# Altium PCB MA18V17.PcbDoc
Units mm, origin at the board's own origin, x right, y up, seen from the top; angles counter-clockwise.
Board outline 93.98 x 57.15 mm, 2 copper layers (Top Layer, Bottom Layer); 20 components, 10 nets, 71 pads, 13 vias.
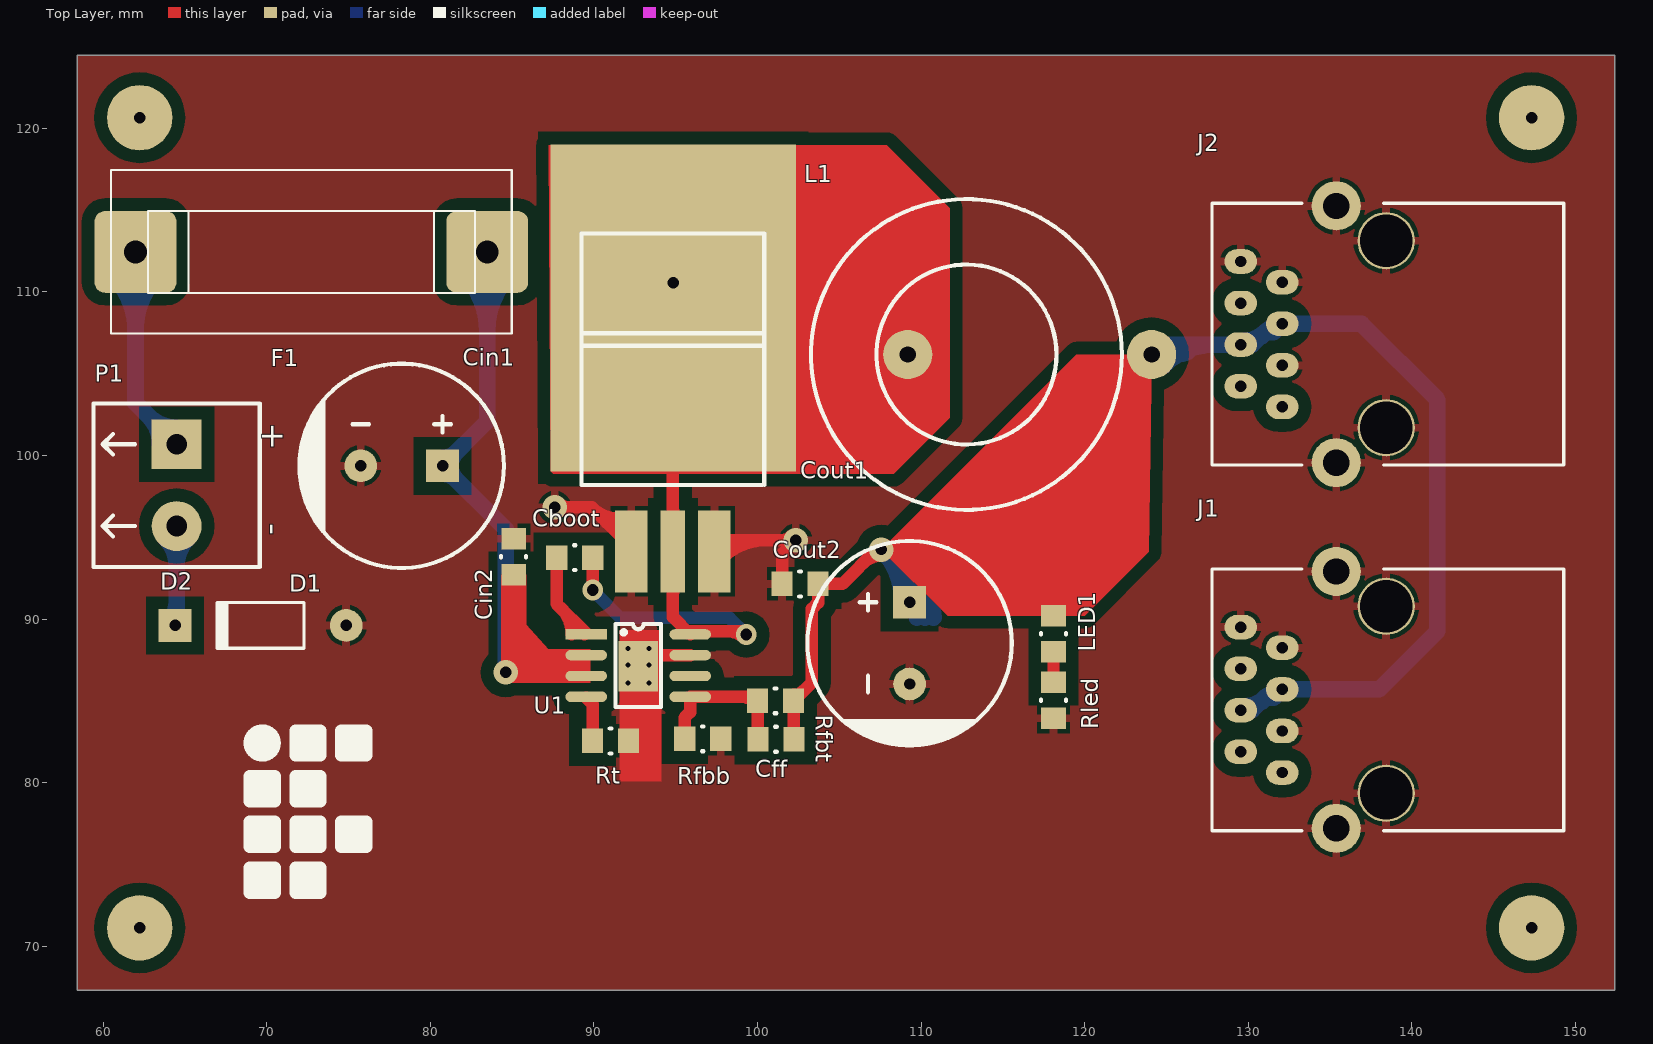
[diagram p0: Top Layer view]
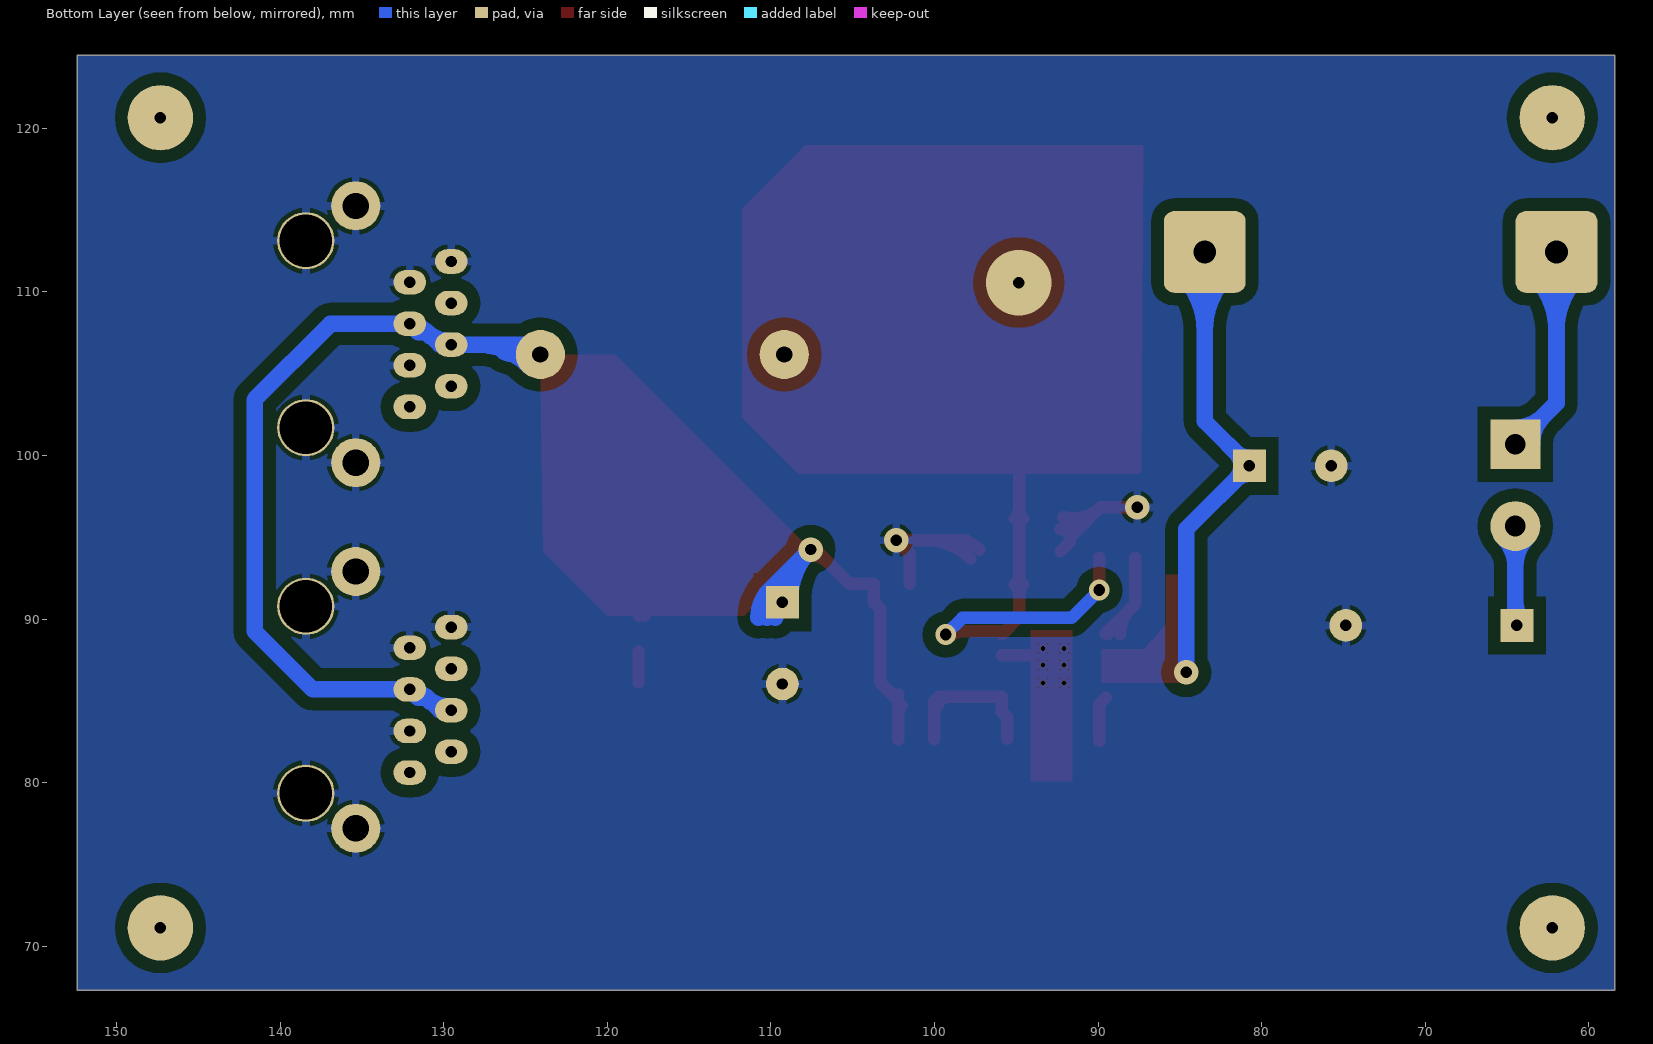
[diagram p1: Bottom Layer view, seen from below]
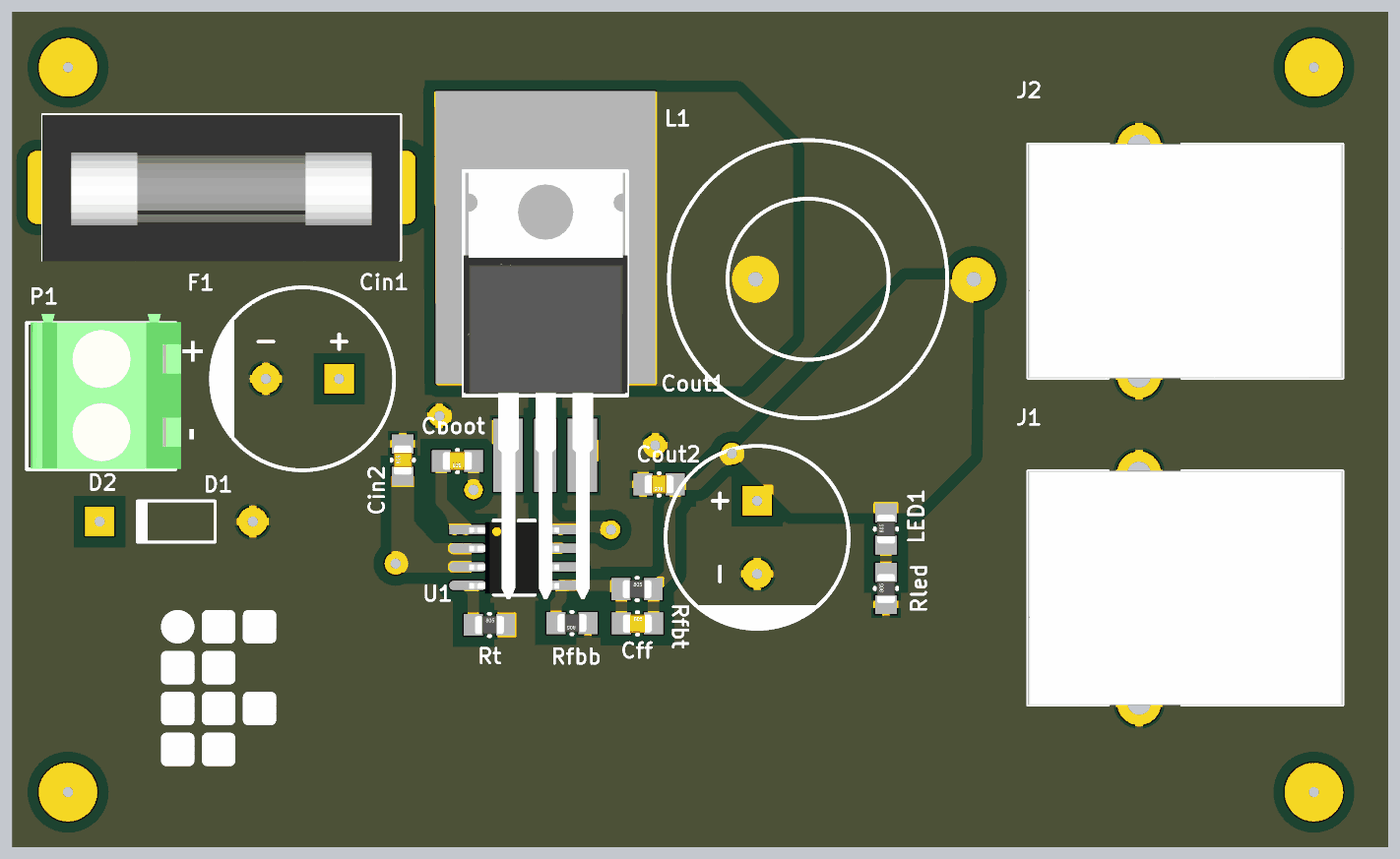
[diagram p2: 3D render of the assembled board from above, using the file's embedded part models]

## Layer stack, top to bottom
Top Layer: signal copper 0.0356
Dielectric: dielectric 0.32, FR-4, Dk 4.8
Bottom Layer: signal copper 0.0356

## Board outline
58.42,67.31 152.4,67.31 152.4,124.46 58.42,124.46

## Design rules (kind name [scope] priority, off if disabled: settings)
Clearance Clearance_malha [InNet('CAN_GND')] p1: gap=0.762
Clearance [All] p2: gap=0.508
HoleSize [All] p1: absolutevalues=TRUE maxlimit=4 minlimit=0.7 maxpercent=80.000 minpercent=20.000
PlaneConnect [All] p1: planeconnectstyle=Relief reliefexpansion=0.508 reliefentries=4 reliefconductorwidth=0.508 reliefairgap=0.254
PolygonConnect [All] p1: connectstyle=Relief reliefconductorwidth=0.508 reliefentries=4 polygonreliefangle="90 Angle"
RoutingVias [All] p1: holewidth=0.711 width=1.27 viastyle="Through Hole" minholewidth=0.711 minwidth=1.27 maxholewidth=0.711 maxwidth=1.27
SilkscreenOverComponentPads [IsPad] p1: minsilkscreentomaskgap=0.254
SolderMaskExpansion [All] p1: expansion=0.102
Width [All] p1: maxlimit=1.016 minlimit=0.254 preferedwidth=0.762
25 further rules are at their usual default settings.

## Components (designator, comment, footprint, x,y, rotation, side; value= is the part's Value field where it differs from the comment)
Cboot "100 nF" 0805C#1 89.925,93.75 r180 top
Cff "33.0 pF" 0805C#1 100.025,82.65 r0 top
Cin1 "100uF" CP-RAD-12.5mm-35.0mm-5.0mm 80.747,99.365 r180 top
Cin2 "100 nF" 0805C#1 85.09,92.71 r90 top
Cout1 "100 uF" CP-RAD-12.5mm-35.0mm-5.0mm 109.296,91.03 r270 top
Cout2 "100 nF" 0805C#2 102.6,92.15 r180 top
D1 "MBR20200CTG" TO-220-DEITADO 74.25,90.325 r0 top
D2 "1N4001" DIO10.46-5.3x2.8 69.621,89.611 r180 top
F1 "Fuse 1" 5x20 61.976,112.446 r0 top
J1 "RJ45 (canbus)" "ASSMANN A-2004-2-4-LP/FS" 138.391,85.062 r90 top
J2 "RJ45 (canbus)" "ASSMANN A-2004-2-4-LP/FS" 138.391,107.414 r90 top
L1 "100 uH" "TOROLDAL D:20, H:10" 112.776,106.172 r225 top
LED1 "150080SS75000" 0805R 118.096,88 r90 top
P1 "Battery" KRE_2 64.491,100.686 r270 top
Rfbb "4k7" 0805R 97.75,82.675 r180 top
Rfbt "110k" 0805R 100,85 r0 top
Rled "750R" 0805R 118.096,83.936 r90 top
Rt "47k" 0805R 89.916,82.55 r0 top
U1 "LMR16030" LMR16030 78.359,80.677 r0 top
X1 "Logomarca IFSC" IFSC_SILK 69.723,82.423 r0 top

## Footprints (in the part's own frame and the unit in brackets; to place one, negate y for a bottom-side part, rotate by r counter-clockwise, add the part's x,y. Pads: shape width x height; smd on the part's side, far side on the other; paste and mask are expansions set on the pad)
5x20 [mm]
  rrect25% 5x5 hole 1.4: 1(0,0) 2(21.5,0)
  silkscreen extent -1.5,-5 23,5, body extent -1.5,-5.05 22.9,4.95, height 10.5
0805C#1 [mm] "Chip Capacitor; Body 2 x 1.3 mm (LxW typ)"
  rect 1.3x1.5 smd: 1(0,0) 2(2.2,0)
  silkscreen extent 1.05,-0.76 1.15,0.76, body extent 0.1,-0.64 2.1,0.62, height 0.78
0805C#2 [mm] "Chip Capacitor; Body 2 x 1.3 mm (LxW typ)"
  rect 1.3x1.5 smd: 1(-1.1,0) 2(1.1,0)
  silkscreen extent -0.05,-0.76 0.05,0.76, body extent -1,-0.64 1,0.62, height 0.78
0805R [mm] "Chip Resistor; Body 2 x 1.3 mm (LxW typ)"
  rect 1.3x1.5 smd: 1(0,0) 2(2.2,0)
  silkscreen extent 1.05,-0.76 1.15,0.76, body extent 0.1,-0.64 2.1,0.62, height 0.78
"ASSMANN A-2004-2-4-LP/FS" [mm]
  oval 1.5x2 hole 0.7: 1(-4.445,6.31) 2(-3.175,8.85) 3(-1.905,6.31) 4(-0.635,8.85) 5(0.635,6.31) 6(1.905,8.85) 7(3.175,6.31) 8(4.445,8.85)
  round 3 hole 1.6: S(-7.855,3.01) S(7.845,3.01)
  round 3.5 hole 3.2: S(-5.715,-0.04) S(5.715,-0.04)
  silkscreen extent -8,-10.9 8,10.6, body extent -8,-10.9 8,10.6, height 13.6
CP-RAD-12.5mm-35.0mm-5.0mm [mm] "Radial Capacitor; D 12.5mm; L 35.0mm; P 5.0mm"
  rect 2x2 hole 0.7: 1(0,0)
  round 2 hole 0.7: 2(5,0)
  silkscreen extent -3.75,-6.25 8.75,6.25
DIO10.46-5.3x2.8 [mm] "Diode, Axial; Body 5.2 x 2.7 mm (LxDia. max), Lead Dia. 0.86 mm (max)"
  round 2 hole 0.7: 1(-5.23,0)
  rect 2x2 hole 0.7: 2(5.23,0)
  silkscreen extent -2.65,-1.4 2.75,1.4
IFSC_SILK [mm]
  silkscreen extent -1.01,-9.14 6.35,1.02
KRE_2 [mil] "Terminal Block 2 pins"
  rect 120x120 hole 50: 1(0,0)
  round 120 hole 50: 2(196.85,0)
  silkscreen extent -98,-200 295,200, body extent -123,-190 294,216, height 559
LMR16030 [mil]
  rect 100x25 smd: 1(440,330)
  oval 100x25 smd: 2(440,280) 3(440,230) 4(440,180) 5(690,180) 6(690,230) 7(690,280) 8(690,330)
  rect 94.49x122.05 smd: 9(565,253.74)
  silkscreen extent 510,155 620,355, body extent 444,157 686,350, height 69
TO-220-DEITADO [mm]
  rect 2x5 smd: 1(18.034,3.81) 3(23.114,3.81)
  rect 1.5x5 smd: 2(20.574,3.81)
  rect 15x20 smd: 4(20.6,18.7)
  silkscreen extent 14.99,7.87 26.16,23.24, body extent 14.99,-6.03 26.21,23.3, height 4.71
"TOROLDAL D:20, H:10" [mm]
  round 3 hole 1: 1(2.54,-2.54) 2(-8.001,8.001)
  silkscreen extent -9.5,-9.5 9.5,9.5, body extent -13.92,-14.11 14.3,14.11, height 10

## Part data
Cboot Cff Cin2 Cout2: library part Capacitor, "Capacitor"
Cin1 Cout1: library part CapacitorPol, "Solid Aluminum Capacitor with Organic Semiconductor Electrolyte: 100uF, 10V, Bulk Pack"
D1: library part CMP-1051-00023-1, "SWITCHMODE(TM) Power Rectifier, Dual Schottky Rectifiers, 3-Pin TO-220, Pb-Free, Tube"
D2: library part "Diode 1N4001", "1 Amp General Purpose Rectifier"
F1: "Fuse"
J1 J2: library part "Modular Jack with Shield", "YH-59-01"
L1: library part Inductor, "Inductor"
LED1: library part CMP-1426-00010-1, "SMD mono-color Chip LED, WL-SMCW, Super Red"
P1: library part KRE_2, "Terminal Block 1x2"
Rfbb Rfbt Rled Rt: library part Resistor, "Resistor"
U1: library part Component_1
X1: library part logomarcaIFSC

## Free pads (board coordinates)
  round 4 hole 0.7: 0(62.23,71.12) 0(62.23,120.65) 1(147.32,71.12) 1(147.32,120.65)

## Via types
v1: diameter 0.3, hole 0.3, Top Layer to Bottom Layer, 6 vias
v2: diameter 1.5, hole 0.7, Top Layer to Bottom Layer, 4 vias
v3: diameter 1.27, hole 0.711, Top Layer to Bottom Layer, 2 vias
v4: diameter 4, hole 0.7, Top Layer to Bottom Layer, 1 vias

## Nets (pads, with @x,y where several pads share a name; then routed paths per layer and width w, separated by ;. In a path a pad name is that pad's centre, name@x,y a point inside that pad or via, vN(x,y) a via of type N, cw(c..) or ccw(c..) an arc to the next point about the centre after c; other vN are vias at no path point)
+18V: Cff.2 Cout1.1 Cout2.1 J1.4 J1.5 J2.4 J2.5 L1.2 LED1.2 Rfbt.2 | length 269.4
  Top Layer w0.762: Cff.2 102.225,84.975 Rfbt.2 103.325,86.125 103.325,90.625 103.7,91 Cout2.1 105.188,92.15 107.288,94.25 v2(107.575,94.25) 114.046,94.25 ; 106.455,93.417 cw(c107.575,92.297) v2@107.575,93.881 ; v2@107.836,93.989 cw(c108.466,93.359) 108.466,94.25 cw(c108.466,95.141) v2@107.836,94.511 ; LED1.2 114.046,94.25 ; L1.2 114.046,96.127 114.046,94.25 ; Rfbt.2@102.01,84.71 cw(c101.49,84.19) 102.225,84.19 ; Rfbt.2@102.01,84.71 cw(c101.49,84.19) 102.225,84.19 ; Rfbt.2@102.01,84.71 cw(c101.49,84.19) 102.225,84.19 ; Rfbt.2@102.01,84.71 cw(c101.49,84.19) 102.225,84.19 ; Rfbt.2@102.2,85.369 ccw(c102.2,86.26) Rfbt.2@102.83,85.63 ; Rfbt.2@102.2,85.369 ccw(c102.2,86.26) Rfbt.2@102.83,85.63 ; Rfbt.2@102.2,85.369 ccw(c102.2,86.26) Rfbt.2@102.83,85.63 ; Rfbt.2@102.2,85.369 ccw(c102.2,86.26) Rfbt.2@102.83,85.63 ; 106.651,93.613 cw(c107.575,92.69) v2@107.575,93.996 ; 106.651,93.613 cw(c107.575,92.69) v2@107.575,93.996 ; 106.651,93.613 cw(c107.575,92.69) v2@107.575,93.996 ; LED1.2@117.466,90.83 cw(c116.836,90.2) LED1.2@117.727,90.2 ; LED1.2@117.466,90.83 cw(c116.836,90.2) LED1.2@117.727,90.2 ; LED1.2@117.466,90.83 cw(c116.836,90.2) LED1.2@117.727,90.2 ; LED1.2@117.466,90.83 cw(c116.836,90.2) LED1.2@117.727,90.2 ; 122.181,104.262 cw(c124.091,102.351) L1.2@124.091,105.053 ; 122.181,104.262 ccw(c120.271,106.172) L1.2@122.972,106.172 ; 122.181,104.262 cw(c124.091,102.351) L1.2@124.091,105.053 ; 122.181,104.262 ccw(c120.271,106.172) L1.2@122.972,106.172 ; 122.181,104.262 cw(c124.091,102.351) L1.2@124.091,105.053 ; 122.181,104.262 ccw(c120.271,106.172) L1.2@122.972,106.172 ; 122.181,104.262 cw(c124.091,102.351) L1.2@124.091,105.053 ; 122.181,104.262 ccw(c120.271,106.172) L1.2@122.972,106.172 ; 122.764,105.395 cw(c124.336,104.974) L1.2@124.01,106.569 ; 122.764,105.395 cw(c124.336,104.974) L1.2@124.01,106.569 ; 122.764,105.395 cw(c124.336,104.974) L1.2@124.01,106.569 ; 122.764,105.395 cw(c124.336,104.974) L1.2@124.01,106.569 ; 122.764,105.395 cw(c124.336,104.974) L1.2@124.01,106.569 ; 122.764,105.395 cw(c124.336,104.974) L1.2@124.01,106.569 ; 123.314,104.845 ccw(c122.893,106.417) L1.2@124.488,106.091 ; 123.314,104.845 ccw(c122.893,106.417) L1.2@124.488,106.091 ; 123.314,104.845 ccw(c122.893,106.417) L1.2@124.488,106.091 ; 123.314,104.845 ccw(c122.893,106.417) L1.2@124.488,106.091 ; 123.314,104.845 ccw(c122.893,106.417) L1.2@124.488,106.091 ; 123.314,104.845 ccw(c122.893,106.417) L1.2@124.488,106.091
  Bottom Layer w1.016: Cout1.1@108.805,91.055 ccw(c104.593,91.268) v2(107.575,94.25) 110.236,91.589 Cout1.1@110.236,90.09 ; 109.193,92.632 cw(c107.672,91.112) Cout1.1@109.82,91.003 ; L1.2 124.698,106.779 J2.4 130.244,106.779 130.994,107.529 ; J1.4 130.244,84.427 130.994,85.177 ; 108.336,93.489 cw(c104.937,90.09) Cout1.1@109.744,90.09 ; 108.336,93.489 cw(c104.937,90.09) Cout1.1@109.744,90.09 ; 108.336,93.489 cw(c104.937,90.09) Cout1.1@109.744,90.09 ; Cout1.1@108.96,91.389 ccw(c108.415,91.97) 109.185,92.177 ; Cout1.1@108.96,91.389 ccw(c108.415,91.97) 109.185,92.177 ; Cout1.1@108.96,91.389 ccw(c108.415,91.97) 109.185,92.177 ; Cout1.1@109.049,91.492 cw(c109.544,90.566) 110.453,91.091 ; Cout1.1@109.049,91.492 cw(c109.544,90.566) 110.453,91.091 ; Cout1.1@109.049,91.492 cw(c109.544,90.566) 110.453,91.091 ; Cout1.1@109.388,91.546 cw(c109.16,90.264) 110.417,90.601 ; Cout1.1@109.388,91.546 cw(c109.16,90.264) 110.417,90.601 ; Cout1.1@109.388,91.546 cw(c109.16,90.264) 110.417,90.601 ; Cout1.1@109.888,90.438 ccw(c109.048,91.278) Cout1.1@110.236,91.278 ; Cout1.1@109.888,90.438 ccw(c109.048,91.278) Cout1.1@110.236,91.278 ; Cout1.1@109.888,90.438 ccw(c109.048,91.278) Cout1.1@110.236,91.278 ; Cout1.1@110.071,91.754 cw(c108.406,90.09) 110.76,90.09 ; Cout1.1@110.071,91.754 cw(c108.406,90.09) 110.76,90.09 ; Cout1.1@110.071,91.754 cw(c108.406,90.09) 110.76,90.09 ; Cout1.1@110.236,91.278 ccw(c111.424,91.278) 110.584,90.438 ; Cout1.1@110.236,91.278 ccw(c111.424,91.278) 110.584,90.438 ; Cout1.1@110.236,91.278 ccw(c111.424,91.278) 110.584,90.438 ; L1.2@124.074,106.189 cw(c125.499,104.765) 125.499,106.779 ; L1.2@124.074,106.189 cw(c125.499,104.765) 125.499,106.779 ; L1.2@124.074,106.189 cw(c125.499,104.765) 125.499,106.779 ; L1.2@124.074,106.189 cw(c125.499,104.765) 125.499,106.779 ; L1.2@124.793,105.471 cw(c127.951,102.312) 127.951,106.779 ; L1.2@124.793,105.471 cw(c127.951,102.312) 127.951,106.779 ; L1.2@124.793,105.471 cw(c127.951,102.312) 127.951,106.779 ; L1.2@124.793,105.471 cw(c127.951,102.312) 127.951,106.779 ; L1.2@124.933,106.696 ccw(c125.804,107.238) 126.316,106.35 ; L1.2@124.933,106.696 ccw(c125.804,107.238) 126.316,106.35 ; L1.2@124.933,106.696 ccw(c125.804,107.238) 126.316,106.35 ; L1.2@124.933,106.696 ccw(c125.804,107.238) 126.316,106.35 ; L1.2@124.933,106.696 ccw(c125.804,107.238) 126.316,106.35 ; J1.4@129.791,84.669 ccw(c129.791,86.348) 130.978,85.161 ; J1.4@129.791,84.669 ccw(c129.791,86.348) 130.978,85.161 ; J1.4@129.791,84.669 ccw(c129.791,86.348) 130.978,85.161 ; J1.4@129.791,84.669 ccw(c129.791,86.348) 130.978,85.161 ; J2.4@129.791,107.021 ccw(c129.791,108.7) 130.978,107.513 ; J2.4@129.791,107.021 ccw(c129.791,108.7) 130.978,107.513 ; J2.4@129.791,107.021 ccw(c129.791,108.7) 130.978,107.513 ; J2.4@129.791,107.021 ccw(c129.791,108.7) 130.978,107.513 ; J1.4@130.001,84.306 cw(c131.198,83.615) 130.84,84.95 ; J1.4@130.001,84.306 cw(c131.198,83.615) 130.84,84.95 ; J1.4@130.001,84.306 cw(c131.198,83.615) 130.84,84.95 ; J1.4@130.001,84.306 cw(c131.198,83.615) 130.84,84.95 ; J1.4@130.001,84.306 cw(c131.198,83.615) 130.84,84.95 ; J1.4@130.001,84.306 cw(c131.198,83.615) 130.84,84.95 ; J2.4@130.001,106.658 cw(c131.198,105.967) 130.84,107.302 ; J2.4@130.001,106.658 cw(c131.198,105.967) 130.84,107.302 ; J2.4@130.001,106.658 cw(c131.198,105.967) 130.84,107.302 ; J2.4@130.001,106.658 cw(c131.198,105.967) 130.84,107.302 ; J2.4@130.001,106.658 cw(c131.198,105.967) 130.84,107.302 ; J2.4@130.001,106.658 cw(c131.198,105.967) 130.84,107.302 ; 130.877,85.06 cw(c131.831,84.106) J1.5@131.831,85.455 ; 130.877,85.06 cw(c131.831,84.106) J1.5@131.831,85.455 ; 130.877,85.06 cw(c131.831,84.106) J1.5@131.831,85.455 ; 130.877,85.06 cw(c131.831,84.106) J1.5@131.831,85.455 ; 130.877,107.412 cw(c131.831,106.458) J2.5@131.831,107.807 ; 130.877,107.412 cw(c131.831,106.458) J2.5@131.831,107.807 ; 130.877,107.412 cw(c131.831,106.458) J2.5@131.831,107.807 ; 130.877,107.412 cw(c131.831,106.458) J2.5@131.831,107.807 ; 130.994,85.177 cw(c131.686,84.485) J1.5@131.802,85.457 ; 130.994,85.177 ccw(c130.994,85.775) J1.5@131.59,85.72 ; 130.994,85.177 cw(c131.686,84.485) J1.5@131.802,85.457 ; 130.994,85.177 ccw(c130.994,85.775) J1.5@131.59,85.72 ; 130.994,85.177 cw(c131.686,84.485) J1.5@131.802,85.457 ; 130.994,85.177 ccw(c130.994,85.775) J1.5@131.59,85.72 ; 130.994,85.177 cw(c131.686,84.485) J1.5@131.802,85.457 ; 130.994,85.177 ccw(c130.994,85.775) J1.5@131.59,85.72 ; 130.994,85.177 131.561,85.177 J1.5 138.01,85.697 141.566,89.253 141.566,103.417 136.934,108.049 J2.5 131.561,107.529 130.994,107.529 ; 130.994,107.529 cw(c131.686,106.837) J2.5@131.802,107.809 ; 130.994,107.529 ccw(c130.994,108.127) J2.5@131.59,108.072 ; 130.994,107.529 cw(c131.686,106.837) J2.5@131.802,107.809 ; 130.994,107.529 ccw(c130.994,108.127) J2.5@131.59,108.072 ; 130.994,107.529 cw(c131.686,106.837) J2.5@131.802,107.809 ; 130.994,107.529 ccw(c130.994,108.127) J2.5@131.59,108.072 ; 130.994,107.529 cw(c131.686,106.837) J2.5@131.802,107.809 ; 130.994,107.529 ccw(c130.994,108.127) J2.5@131.59,108.072 ; 109.173,92.223 ccw(c111.887,92.95) 110.482,90.516 cw(c111.887,92.95) 109.173,92.223 ; Cout1.1@109.562,90.616 cw(c109.959,89.999) 110.444,90.55 ccw(c109.959,89.999) Cout1.1@109.562,90.616
+VBAT: F1.1 P1.1 | length 58.4
  Bottom Layer w1.016: F1.1 61.976,103.2 P1.1 ; F1.1@60.567,111.037 cw(c57.167,107.637) 61.976,107.637 ; F1.1@60.567,111.037 cw(c57.167,107.637) 61.976,107.637 ; F1.1@60.567,111.037 cw(c57.167,107.637) 61.976,107.637 ; F1.1@60.567,111.037 cw(c57.167,107.637) 61.976,107.637 ; 61.976,107.637 cw(c66.785,107.637) F1.1@63.385,111.037 ; 61.976,107.637 cw(c66.785,107.637) F1.1@63.385,111.037 ; 61.976,107.637 cw(c66.785,107.637) F1.1@63.385,111.037 ; 61.976,107.637 cw(c66.785,107.637) F1.1@63.385,111.037 ; 62.756,102.42 cw(c61.022,100.686) P1.1@63.475,100.686 ; 62.756,102.42 ccw(c64.491,104.154) P1.1@64.491,101.702 ; 62.756,102.42 cw(c61.022,100.686) P1.1@63.475,100.686 ; 62.756,102.42 ccw(c64.491,104.154) P1.1@64.491,101.702 ; 62.756,102.42 cw(c61.022,100.686) P1.1@63.475,100.686 ; 62.756,102.42 ccw(c64.491,104.154) P1.1@64.491,101.702 ; 62.756,102.42 cw(c61.022,100.686) P1.1@63.475,100.686 ; 62.756,102.42 ccw(c64.491,104.154) P1.1@64.491,101.702
CAN_GND: Cin1.2 Cin2.2 Cout1.2 Cout2.2 D1.1 D1.3 D2.1 J1.3 J1.7 J1.8 J1.S J2.3 J2.7 J2.8 J2.S Rfbb.1 Rled.1 Rt.2 U1.7 U1.9 | length 28.9
  Top Layer w0.762: v2(87.605,96.825) 89.867,96.825 ; v2@87.866,96.564 cw(c88.495,95.934) 88.495,96.825 cw(c88.495,97.716) v2@87.866,97.086 ; 90.791,95.901 ccw(c91.902,97.012) D1.1@92.322,95.497 ; Rt.2 Rt.2@92.284,82.718 ; D1.1@92.119,96.232 cw(c91.501,98.459) 89.867,96.825 ; D1.1 91.718,94.701 91.718,94.973 89.867,96.825 ; U1.9@93.377,87.789 U1.7 ; D1.3@97.263,94.236 cw(c98.668,92.831) 98.668,94.818 ; D1.3@97.802,93.697 cw(c100.508,90.991) 100.508,94.818 ; D1.3@98.047,94.818 v2(102.337,94.818) 101.5,93.982 Cout2.2 ; v2@101.968,94.818 cw(c101.077,94.818) 101.707,94.188 cw(c102.337,93.558) v2@102.337,94.449 ; v2@102.076,94.557 ccw(c101.446,93.927) 101.446,94.818 ccw(c101.446,95.709) v2@102.076,95.079
  other v1: 92.071,86.086 93.371,86.086 92.071,87.186 93.371,87.186 92.071,88.211 93.371,88.211
NetCboot_1: Cboot.1 D1.2 D1.4 L1.1 U1.8 | length 47.3
  Top Layer w0.762: v3(89.925,91.775) Cboot.1 ; D1.4@94.85,107.681 94.824,107.655 D1.2 94.824,90.12 U1.8 ; U1.8@95.885,89.249 99.117,89.249 v3(99.314,89.052) ; 98.225,89.249 cw(c98.225,87.963) v3@99.134,88.873 ; D1.2@94.563,92.124 cw(c93.933,91.494) 94.824,91.494 ; D1.2@94.563,92.124 cw(c93.933,91.494) 94.824,91.494 ; D1.2@94.563,92.124 cw(c93.933,91.494) 94.824,91.494 ; D1.2@94.563,92.124 cw(c93.933,91.494) 94.824,91.494 ; D1.2@94.563,96.146 ccw(c93.933,96.776) 94.824,96.776 ; D1.2@94.563,96.146 ccw(c93.933,96.776) 94.824,96.776 ; D1.2@94.563,96.146 ccw(c93.933,96.776) 94.824,96.776 ; D1.2@94.563,96.146 ccw(c93.933,96.776) 94.824,96.776 ; 94.824,91.494 cw(c95.715,91.494) D1.2@95.085,92.124 ; 94.824,91.494 cw(c95.715,91.494) D1.2@95.085,92.124 ; 94.824,91.494 cw(c95.715,91.494) D1.2@95.085,92.124 ; 94.824,91.494 cw(c95.715,91.494) D1.2@95.085,92.124 ; 94.824,96.776 ccw(c95.715,96.776) D1.2@95.085,96.146 ; 94.824,96.776 ccw(c95.715,96.776) D1.2@95.085,96.146 ; 94.824,96.776 ccw(c95.715,96.776) D1.2@95.085,96.146 ; 94.824,96.776 ccw(c95.715,96.776) D1.2@95.085,96.146
  Bottom Layer w0.762: v3(89.925,91.775) 91.625,90.075 98.291,90.075 v3(99.314,89.052)
  other v4: 94.849,110.57
NetCboot_2: Cboot.2 U1.1 | length 11.9
  Top Layer w0.762: Cboot.2 87.725,90.933 U1.1@89.535,89.122 ; 87.972,90.685 cw(c86.346,89.059) U1.1@88.646,89.059 ; 87.972,90.685 cw(c86.346,89.059) U1.1@88.646,89.059 ; 87.972,90.685 cw(c86.346,89.059) U1.1@88.646,89.059 ; 89.273,89.384 cw(c88.948,89.059) U1.1@89.408,89.059 ; 89.273,89.384 cw(c88.948,89.059) U1.1@89.408,89.059 ; 89.273,89.384 cw(c88.948,89.059) U1.1@89.408,89.059
NetCff_1: Cff.1 Rfbb.2 Rfbt.1 U1.5 | length 15.2
  Top Layer w0.762: Rfbb.2 95.55,83.975 95.885,84.31 U1.5 99.751,85.249 Rfbt.1 100.025,84.975 Cff.1 ; 98.991,85.249 cw(c98.991,84.091) Rfbt.1@99.81,84.91 ; 98.991,85.249 cw(c98.991,84.091) Rfbt.1@99.81,84.91 ; 98.991,85.249 cw(c98.991,84.091) Rfbt.1@99.81,84.91 ; 98.991,85.249 cw(c98.991,84.091) Rfbt.1@99.81,84.91 ; Rfbt.1@99.81,84.71 cw(c99.29,84.19) 100.025,84.19 ; Rfbt.1@99.81,84.71 cw(c99.29,84.19) 100.025,84.19 ; Rfbt.1@99.81,84.71 cw(c99.29,84.19) 100.025,84.19 ; Rfbt.1@99.81,84.71 cw(c99.29,84.19) 100.025,84.19
NetCin1_1: Cin1.1 Cin2.1 F1.2 U1.2 U1.3 | length 73.6
  Bottom Layer w1.016: F1.2 83.476,102.094 Cin1.1 84.607,95.504 v2(84.607,86.741) ; Cin1.1@80.747,98.873 cw(c80.747,97.685) Cin1.1@81.586,98.525 ; Cin1.1@80.747,98.873 cw(c80.747,97.685) Cin1.1@81.586,98.525 ; Cin1.1@80.747,98.873 cw(c80.747,97.685) Cin1.1@81.586,98.525 ; Cin1.1@80.747,98.873 cw(c80.747,97.685) Cin1.1@81.586,98.525 ; Cin1.1@80.747,99.857 ccw(c80.747,101.045) Cin1.1@81.586,100.205 ; Cin1.1@80.747,99.857 ccw(c80.747,101.045) Cin1.1@81.586,100.205 ; Cin1.1@80.747,99.857 ccw(c80.747,101.045) Cin1.1@81.586,100.205 ; Cin1.1@80.747,99.857 ccw(c80.747,101.045) Cin1.1@81.586,100.205 ; Cin1.1@81.239,99.365 ccw(c82.426,99.365) Cin1.1@81.586,98.525 ; Cin1.1@81.239,99.365 cw(c82.426,99.365) Cin1.1@81.586,100.205 ; Cin1.1@81.239,99.365 ccw(c82.426,99.365) Cin1.1@81.586,98.525 ; Cin1.1@81.239,99.365 cw(c82.426,99.365) Cin1.1@81.586,100.205 ; Cin1.1@81.239,99.365 ccw(c82.426,99.365) Cin1.1@81.586,98.525 ; Cin1.1@81.239,99.365 cw(c82.426,99.365) Cin1.1@81.586,100.205 ; Cin1.1@81.239,99.365 ccw(c82.426,99.365) Cin1.1@81.586,98.525 ; Cin1.1@81.239,99.365 cw(c82.426,99.365) Cin1.1@81.586,100.205 ; F1.2@82.067,111.037 cw(c78.667,107.637) 83.476,107.637 ; F1.2@82.067,111.037 cw(c78.667,107.637) 83.476,107.637 ; F1.2@82.067,111.037 cw(c78.667,107.637) 83.476,107.637 ; F1.2@82.067,111.037 cw(c78.667,107.637) 83.476,107.637 ; 83.476,107.637 cw(c88.285,107.637) F1.2@84.885,111.037 ; 83.476,107.637 cw(c88.285,107.637) F1.2@84.885,111.037 ; 83.476,107.637 cw(c88.285,107.637) F1.2@84.885,111.037 ; 83.476,107.637 cw(c88.285,107.637) F1.2@84.885,111.037
NetD2_2: D2.2 P1.2 | length 26.2
  Bottom Layer w1.016: D2.2@64.491,89.71 P1.2 ; P1.2@63.772,94.967 cw(c62.038,93.233) 64.491,93.233 ; P1.2@63.772,94.967 cw(c62.038,93.233) 64.491,93.233 ; P1.2@63.772,94.967 cw(c62.038,93.233) 64.491,93.233 ; P1.2@63.772,94.967 cw(c62.038,93.233) 64.491,93.233 ; D2.2@64.044,89.959 ccw(c62.964,91.038) 64.491,91.038 ; D2.2@64.044,89.959 ccw(c62.964,91.038) 64.491,91.038 ; D2.2@64.044,89.959 ccw(c62.964,91.038) 64.491,91.038 ; D2.2@64.044,89.959 ccw(c62.964,91.038) 64.491,91.038 ; 64.491,93.233 cw(c66.943,93.233) P1.2@65.209,94.967 ; 64.491,93.233 cw(c66.943,93.233) P1.2@65.209,94.967 ; 64.491,93.233 cw(c66.943,93.233) P1.2@65.209,94.967 ; 64.491,93.233 cw(c66.943,93.233) P1.2@65.209,94.967
NetLED1_1: LED1.1 Rled.2 | length 1.9
  Top Layer w0.762: Rled.2 LED1.1
NetRt_1: Rt.1 U1.4 | length 2.8
  Top Layer w0.762: U1.4@89.535,85.185 89.916,84.804 Rt.1
pads on no net: J1.1 J1.2 J1.6 J2.1 J2.2 J2.6 U1.6

## Polygon pours and split planes (outlines as drawn)
CAN_GND on Bottom Layer "GND" (solid, remove dead copper, pour order 4): 58.42,124.46 152.4,124.46 152.4,67.31 58.42,67.31
CAN_GND on Top Layer "GND" (solid, remove dead copper, pour order 3): 58.42,124.46 152.4,124.46 152.4,67.31 58.42,67.31

## Other copper
Top Layer:
  rectangle net CAN_GND: 91.567,80.061 94.138,89.341
  region net NetCin1_1: 89.789,88.138 89.789,86.106 84.836,86.106 84.201,86.741 84.328,86.868 84.328,92.71 85.852,92.71 85.852,89.637 87.214,88.138
  region net +18V: 124.091,106.172 119.497,106.172 107.575,94.25 111.625,90.2 120,90.2 123.925,94.125
  region net NetCboot_1: 87.25,118.975 107.9,118.975 111.75,115.125 111.75,102.3 108.325,98.875 87.5,98.875 87.35,99.025

## Silkscreen, mask and mechanical layers (free items; w line width, h text height)
Top Overlay:
  text "+" at 71.45,100.305 h2.54 r90
  text "-" at 71.321,95.125 h2.54 r90
Mechanical 1:
  the board outline again, w0.254